# Altium PCB STM32F407VET6_4Layer_PCB.PcbDoc (part 2 of 3)
Units mm, origin at the board's own origin, x right, y up, seen from the top; angles counter-clockwise.
Board outline 86 x 80 mm, 4 copper layers (L1, L2, L3, L4), stack 0.999 mm thick; 172 components, 128 nets, 654 pads, 524 vias.
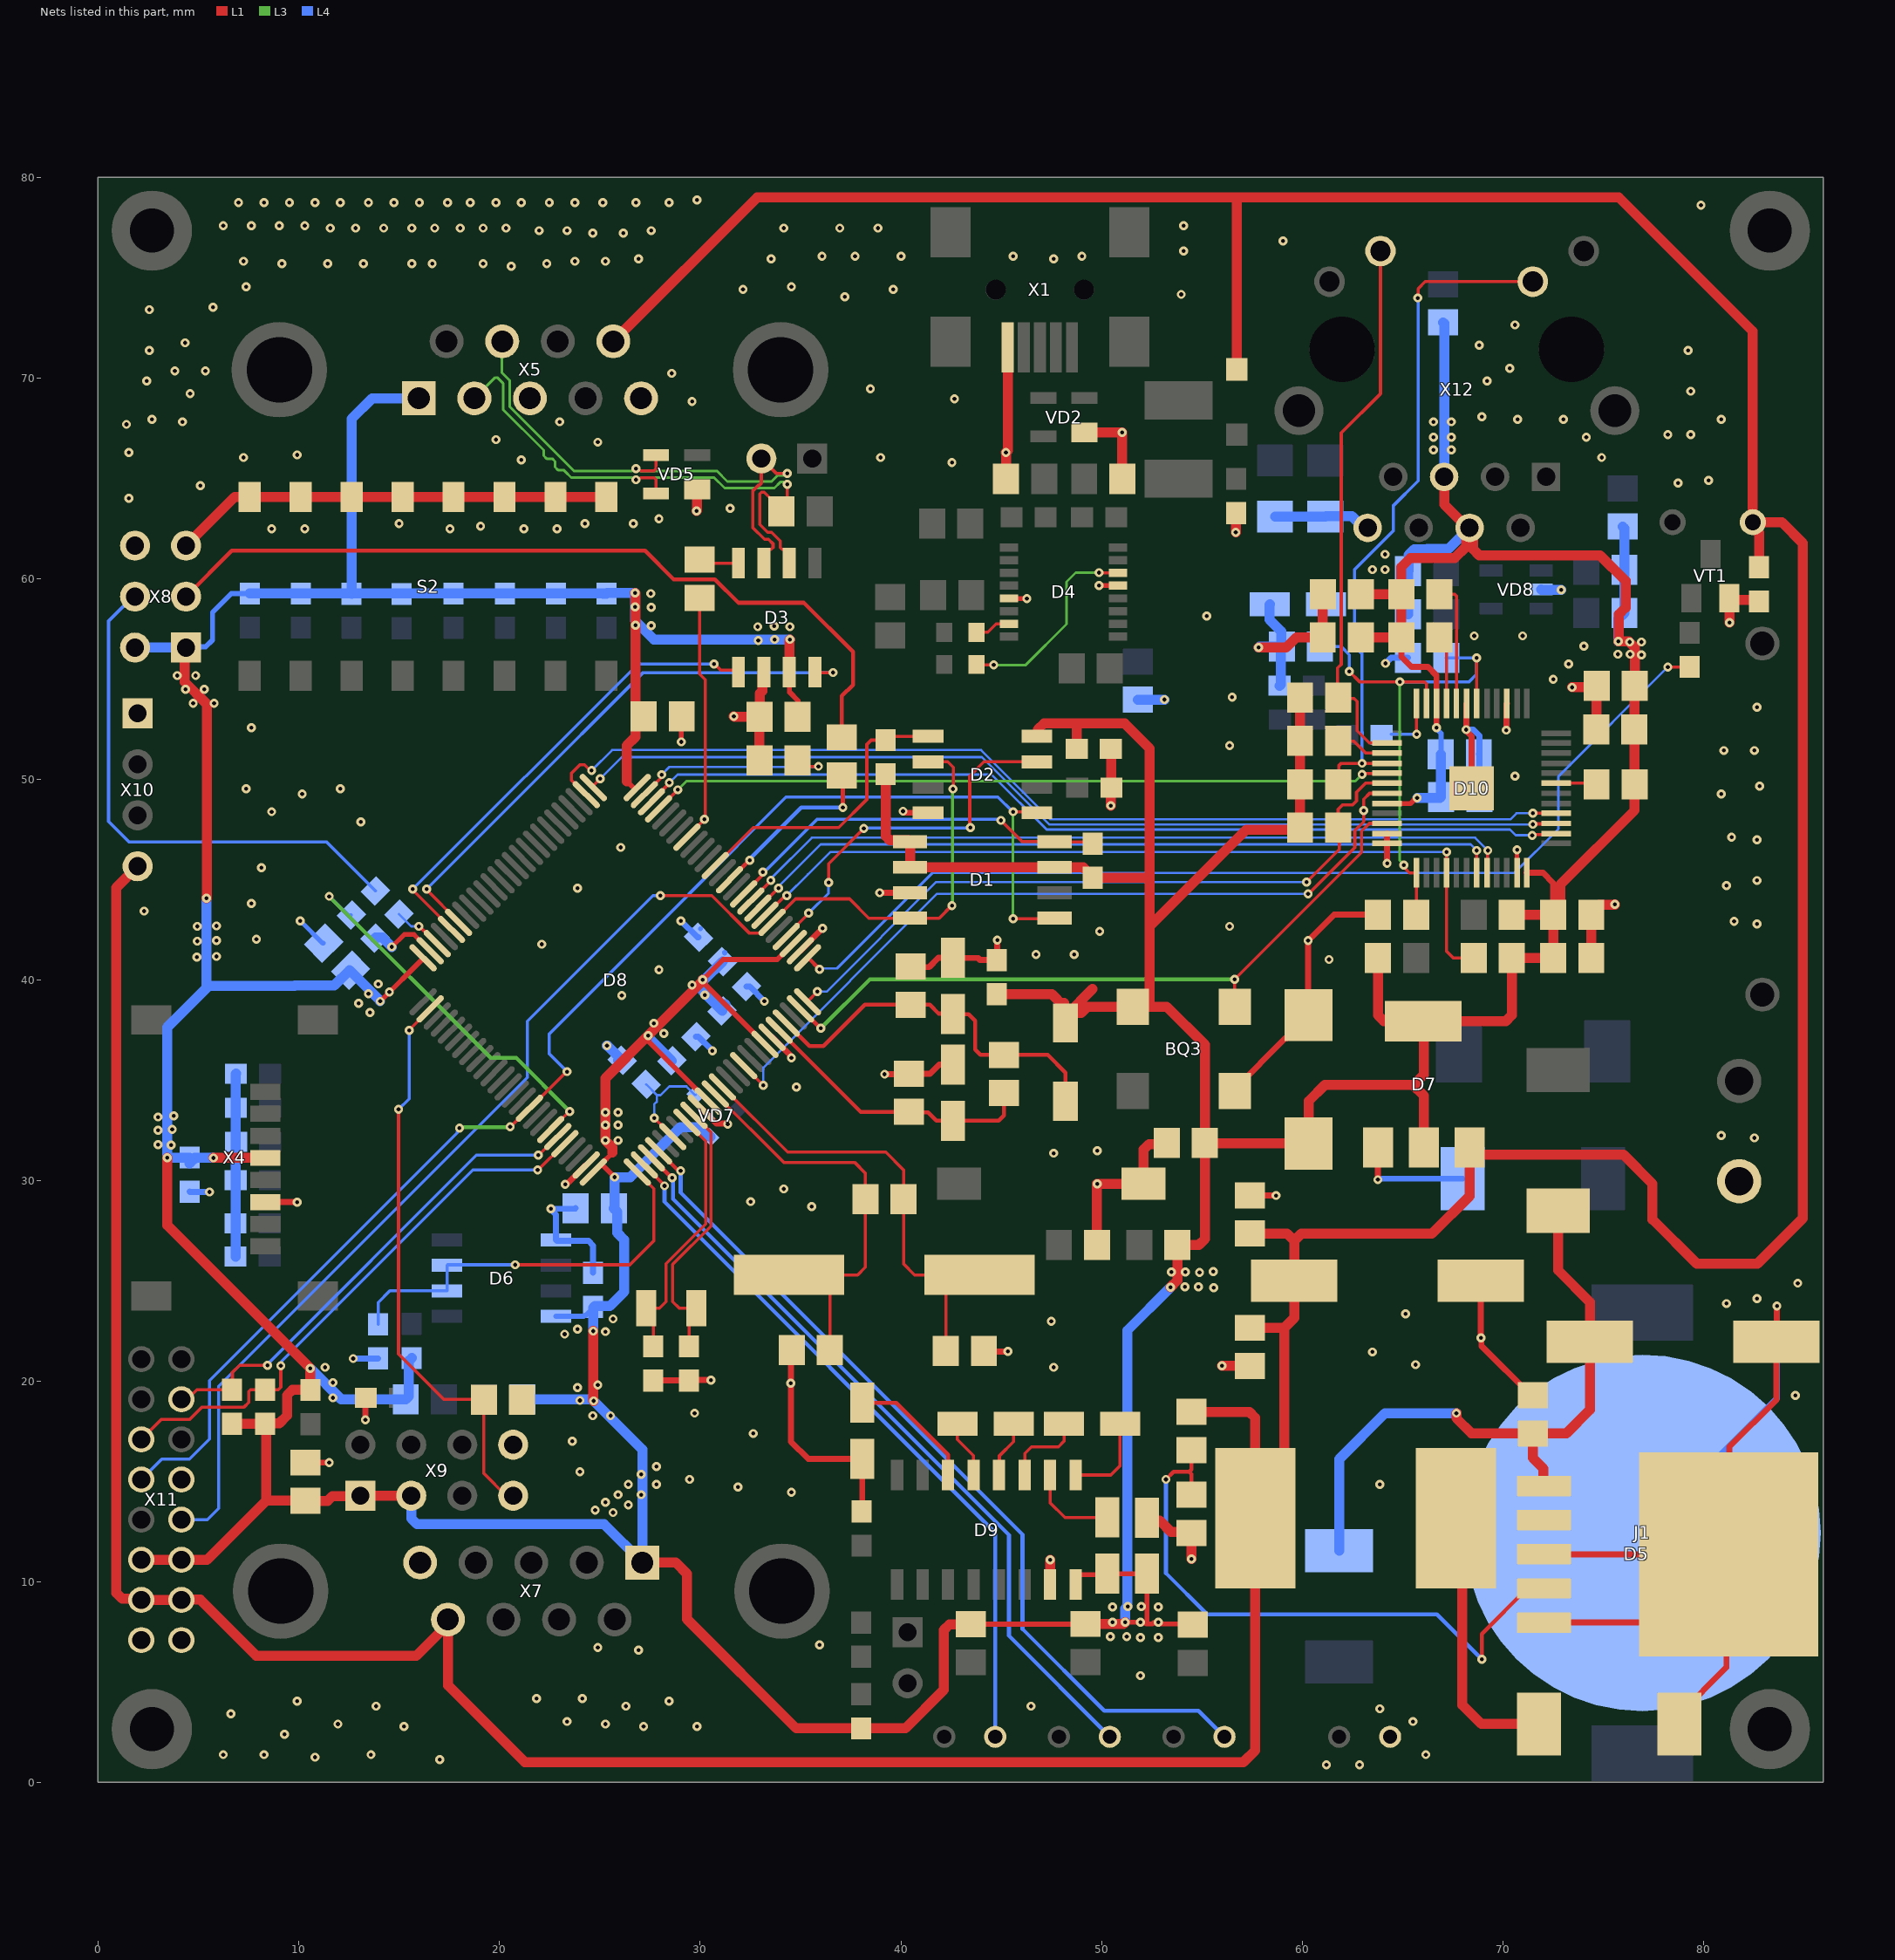
[diagram p4: the nets of this part, all layers, seen from the top]

## Via types
v1: diameter 0.45, hole 0.2, L1 to L4, 524 vias

## Nets (pads, with @x,y where several pads share a name; then routed paths per layer and width w, separated by ;. In a path a pad name is that pad's centre, name@x,y a point inside that pad or via, vN(x,y) a via of type N, cw(c..) or ccw(c..) an arc to the next point about the centre after c; other vN are vias at no path point)
3V3: BQ3.4 C2.2 C3.1 C8.2 C10.1 C11.1 C19.1 C20.2 C21.2 C22.2 C23.1 C24.2 C27.2 C28.2 C33.2 C39.1 C40.1 C41.1 C42.1 C43.2 C45.2 C48.2 C49.2 C50.1 C51.1 D1.3 D1.5 D1.6 D2.8 D3.3 D6.8 D7.2 D7.4 D8.11 D8.19 D8.28 D8.50 D8.75 D8.100 D9.16 D10.22 D10.32 D10.48 L2.1 R1.2 R2.2 R10.2 R12.2 R13.2 R14.2 R15.2 R17.2 R18.2 R22.1 R31.2 R32.1 R33.1 R34.1 R35.2 R36.2 R37.2 R38.2 R40.2 R42.2 R43.2 R45.2 R46.2 R47.2 R48.2 R49.2 R50.2 R52.2 R54.2 R55.2 R56.2 R57.2 R58.2 R59.2 R60.2 R61.2 R62.2 R63.2 R64.2 R65.2 R66.2 R67.2 R69.2 R70.2 VD7.2 X4.4 X5.1 X7.1 X8.1 X8.2 X9.1 X9.3 X11.11 X11.12 X12.4 X12.5 | length 502.8
  L1 w0.25: v1(14.046,38.938) 16.185,41.077 D8.75@16.185,41.107 ; D8.100@24.67,30.429 D8.100@25.057,30.816 ; 25.629,31.394 25.629,31.388 D8.100@25.057,30.816 ; v1(25.73,30.175) 25.089,30.816 D8.100@25.057,30.816 ; 26.34,49.911 26.744,49.507 26.777,49.507 D8.50@26.862,49.592 ; v1(27.407,37.236) 27.445,37.198 27.445,36.918 D8.11@30.398,33.965 ; D8.19@33.226,36.793 30.163,39.857 30.163,39.967 v1(30.124,40.005) 31.14,41.021 33.834,41.021 34.627,41.814 D8.28@34.64,41.814 ; D3.3@34.442,55.352 34.442,54.331 34.468,54.331 34.874,53.924 34.874,53.137 C8.2@34.849,53.111 ; R33.1@43.485,7.894 49.185,7.894 R34.1@49.2,7.91 ; D9.16@48.705,9.871 48.705,10.183 48.885,10.363 50.241,10.363 C20.2@50.292,10.414 50.295,10.411 C23.1@52.273,10.411 52.273,7.935 52.299,7.91 ; v1(51.181,8.001) v1(51.943,8.001) 51.981,7.963 52.179,7.963 52.232,7.91 52.299,7.91 ; R32.1@54.559,7.869 54.519,7.91 52.978,7.91 52.886,8.001 v1(52.832,8.001) 52.794,7.963 52.596,7.963 52.543,7.91 52.299,7.91 ; D10.32@64.237,48.793 65.402,48.793 65.681,49.073 v1(65.735,49.073)
  L1 w0.3: R42.2@64.948,57.074 64.948,56.109 65.456,55.601 66.269,55.601 66.7,55.169 D10.22@66.7,53.772 v1(66.7,52.578) ; D10.48@71.196,45.339 72.009,45.339 72.517,44.831 C39.1@72.517,43.256
  L1 w0.5: X11.11@2.14,11.106 X11.12@4.14,11.106 5.417,11.106 8.362,14.051 ; v1(3.429,31.14) 3.429,27.781 v1(10.566,20.643) R38.2@10.566,19.57 10.553,19.583 9.677,19.583 9.398,19.304 9.398,18.288 9.017,17.907 8.329,17.907 R60.2@8.306,17.883 ; X8.1@4.369,56.566 4.293,56.49 4.293,54.864 5.41,53.746 5.41,44.094 v1(5.385,44.069) ; v1(5.733,31.133) X4.4@8.331,31.133 ; R67.2@6.655,17.883 R60.2@8.306,17.883 ; X9.3@15.596,14.3 X9.1@13.056,14.3 13.03,14.275 11.659,14.275 11.43,14.046 10.317,14.046 C43.2@10.312,14.051 8.362,14.051 ; v1(24.663,22.504) 24.663,19.05 v1(24.689,19.025) ; 25.629,31.394 25.629,31.648 v1(25.273,32.004) 25.273,35.103 v1(27.407,37.236) 30.124,39.954 v1(30.124,40.005) ; 26.34,49.911 26.34,51.689 26.772,52.121 26.772,59.258 v1(26.746,59.284) ; X7.1@27.118,10.968 28.783,10.968 29.337,10.414 29.337,8.153 34.784,2.706 R22.1@38.024,2.706 40.222,2.706 42.139,4.623 42.139,7.602 42.431,7.894 R33.1@43.485,7.894 ; D3.3@34.442,55.352 34.442,56.947 v1(34.468,56.972) ; R1.2@39.243,50.255 39.243,47.168 39.447,46.963 40.387,46.963 D1.5@40.462,46.888 D1.6@40.462,45.618 D1.3@47.662,45.618 49.086,45.618 49.555,45.149 R2.2@49.555,45.099 52.371,45.099 52.408,45.136 ; C2.2@44.78,39.296 47.534,39.296 L2.1@48.133,38.696 ; D2.8@46.781,52.146 46.838,52.203 46.838,52.488 47.13,52.781 48.793,52.781 ; L2.1@48.133,37.936 L2.1@48.133,38.696 ; 48.133,38.868 L2.1@48.133,38.696 ; L2.1@48.184,38.645 L2.1@48.133,38.696 ; C3.1@48.77,51.511 48.77,52.758 48.793,52.781 ; R34.1@49.2,7.91 51.09,7.91 v1(51.181,8.001) ; 49.555,39.556 48.26,38.261 48.26,37.987 48.635,38.362 48.985,38.362 49.291,38.668 BQ3.4@51.562,38.668 52.408,38.668 ; v1(53.442,24.689) 53.782,25.029 R31.2@53.782,26.797 54.861,26.797 55.154,27.09 C45.2@55.154,31.877 ; R48.2@59.898,54.077 R52.2@59.898,51.918 R50.2@59.898,49.759 R45.2@59.898,47.6 59.797,47.498 57.226,47.498 52.408,42.68 ; C49.2@62.931,57.079 C49.2@62.926,57.074 R42.2@64.948,57.074 R43.2@64.948,59.233 ; C48.2@62.936,59.233 R43.2@64.948,59.233 ; R46.2@63.784,41.097 63.784,38.24 64.077,37.948 D7.4@66.04,37.948 ; D7.2@66.065,31.648 66.065,34.239 65.532,34.773 ; X12.5@67.081,65.075 67.081,63.703 68.25,62.535 X12.4@68.351,62.535 ; R47.2@70.455,43.256 C39.1@72.517,43.256 ; R60.2@8.306,17.883 8.362,17.828 8.362,14.051 ; 48.793,52.781 51.156,52.781 52.408,51.528 52.408,45.136 ; 52.408,38.668 52.408,42.68 ; 52.408,38.668 53.255,38.668 55.154,36.769 C45.2@55.154,31.877 ; 52.408,42.68 52.408,45.136 ; C45.2@55.154,31.877 55.179,31.852 C19.1@60.325,31.852 60.325,33.96 61.138,34.773 65.532,34.773 ; R43.2@64.948,59.233 64.948,60.579 65.405,61.036 67.615,61.036 68.175,61.596 68.175,62.358 X12.4@68.351,62.535 ; 65.532,34.773 65.557,34.773 66.065,35.281 66.065,37.922 D7.4@66.04,37.948 ; D7.4@66.04,37.948 70.155,37.948 70.455,38.247 R49.2@70.455,41.097 C40.1@72.517,41.097 C39.1@72.517,43.256 ; X12.4@68.351,62.535 68.528,62.358 68.528,61.469 68.834,61.163 74.854,61.163 76.124,59.893 76.124,58.56 75.781,58.217 75.781,56.883 v1(75.768,56.871) 76.288,56.871 76.581,56.578 C50.1@76.581,54.661 76.573,54.653 76.573,52.484 C51.1@76.566,52.476 76.571,52.471 76.571,49.764 R35.2@76.576,49.759 76.576,48.458 72.874,44.756 72.874,43.613 C39.1@72.517,43.256
  L4 w0.25: X8.1@4.369,56.566 4.408,56.605 5.347,56.605 5.69,56.947 5.69,58.318 6.629,59.258 R54.2@7.544,59.258 ; D6.8@22.803,23.241 24.193,23.241 24.238,23.287 24.288,23.287 C10.1@24.663,23.662 ; R66.2@25.171,59.256 R66.2@25.173,59.256 ; C27.2@31.217,41.351 C27.2@31.217,41.377 ; v1(66.7,52.578) 66.7,52.524 66.929,52.295 66.929,51.278 C41.1@66.909,51.257
  L4 w0.5: X8.2@1.829,56.566 X8.1@4.369,56.566 ; C11.1@4.547,30.861 4.75,31.064 4.75,31.086 4.797,31.133 v1(5.733,31.133) ; C11.1@4.547,31.152 4.535,31.14 v1(3.429,31.14) 3.429,37.643 5.385,39.599 ; v1(5.385,44.069) 5.385,39.599 ; 6.821,30.937 6.846,30.963 ; R13.2@6.834,26.213 6.846,26.225 6.846,30.963 ; R14.2@6.858,35.331 6.846,35.32 6.846,30.963 ; R54.2@7.544,59.258 R54.2@7.544,59.258 R56.2@12.624,59.257 ; v1(10.566,20.643) 12.109,19.101 R40.2@15.321,19.101 15.471,19.251 15.471,21.01 R10.2@15.621,21.16 ; R56.2@12.624,59.245 R56.2@12.624,59.257 ; v1(14.046,38.938) 14.046,38.969 12.525,40.49 11.76,39.726 9.804,39.726 9.779,39.7 5.486,39.7 5.385,39.599 ; X9.3@15.596,14.3 15.596,13.171 15.888,12.878 25.208,12.878 X7.1@27.118,10.968 27.118,16.595 v1(24.689,19.025) 24.613,19.101 R36.2@21.133,19.101 ; X5.1@15.972,68.989 13.642,68.989 12.624,67.97 R56.2@12.624,59.257 ; v1(24.663,22.504) 24.663,23.662 24.751,23.749 25.502,23.749 26.213,24.46 26.213,27.051 25.857,27.407 25.857,28.458 C28.2@25.69,28.626 25.73,28.666 v1(25.73,30.175) 26.518,30.175 29.007,32.664 30.006,32.664 30.485,32.184 VD7.2@30.508,32.184 ; v1(27.407,37.236) 27.407,37.152 C24.2@28.584,35.975 ; C22.2@31.098,38.464 30.116,39.446 30.116,39.997 v1(30.124,40.005) 30.201,40.005 C27.2@31.115,40.919 ; C22.2@31.242,38.777 C22.2@31.242,38.786 ; v1(34.468,56.972) 27.686,56.972 26.746,57.912 v1(26.746,59.284) 25.351,59.284 R66.2@25.324,59.256 R66.2@25.173,59.256 ; v1(51.181,8.001) 51.181,8.672 51.283,8.773 51.283,22.53 v1(53.442,24.689) ; R63.2@65.283,58.217 65.28,58.219 65.28,60.373 R65.2@65.278,60.376 65.303,60.401 65.303,61.181 65.596,61.474 66.251,61.474 66.253,61.476 67.292,61.476 X12.4@68.351,62.535 ; v1(65.735,49.073) 66.883,49.073 66.921,49.111 66.921,51.244 C41.1@66.909,51.257 ; R70.2@67.031,72.771 67.081,72.72 X12.5@67.081,65.075 ; v1(75.768,56.871) 75.768,57.993 R61.2@76.068,58.293 R58.2@76.068,60.452 76.068,62.504 R69.2@75.971,62.601 ; R56.2@12.624,59.257 R66.2@25.172,59.257 ; R66.2@25.172,59.257 R66.2@25.173,59.256
  other v1: 51.943,7.239 52.832,7.239 50.446,7.275 51.257,7.275 50.546,8.001 50.546,8.763 51.308,8.773 51.994,8.773 52.832,8.763 25.654,13.462 24.765,13.589 26.416,13.843 25.273,13.97 25.908,14.351 27.051,14.351 26.416,14.859 27.813,14.859 27.051,15.367 27.813,15.748 24.638,18.288 25.527,18.288 24.003,19.05 11.684,19.177 23.876,19.685 24.892,19.812 11.684,19.939 11.303,20.701 23.241,22.352 25.273,22.479 23.876,22.606 25.654,23.114 55.601,24.663 54.153,24.714 54.839,24.714 54.889,25.425 53.492,25.451 54.178,25.451 55.575,25.476 3.632,31.775 2.972,31.801 25.908,32.004 2.972,32.512 3.683,32.563 25.273,32.766 25.908,32.766 2.972,33.172 3.759,33.223 25.273,33.401 25.908,33.401 28.194,37.338 27.686,37.846 13.538,38.379 12.979,38.837 30.226,39.243 13.462,39.319 14.503,39.395 29.591,39.751 13.945,39.802 4.902,41.148 5.893,41.173 4.928,41.935 5.893,41.961 4.928,42.672 5.893,42.697 4.724,53.797 5.766,53.797 4.343,54.483 5.283,54.483 3.937,55.169 4.851,55.169 76.911,56.21 75.743,56.236 76.352,56.236 76.327,56.845 76.911,56.845 32.893,56.921 33.706,56.972 32.868,57.607 34.468,57.607 33.68,57.633 27.559,57.658 26.772,57.683 27.559,58.572 26.746,58.598 27.534,59.258 63.5,60.452 64.135,60.452 64.135,61.214 66.548,66.421 67.437,66.421 66.548,67.056 67.437,67.056 66.548,67.818 67.437,67.818
5V: C12.2 C13.1 C14.2 C44.2 D7.3 G1.+ L1.2 R26.2 VD4.C X5.9 X7.9 X10.4 X11.13 X11.14 | length 292.6
  L1 w0.5: X10.4@1.956,45.669 0.889,44.602 0.889,9.462 1.182,9.169 2.077,9.169 X11.13@2.14,9.106 X11.14@4.14,9.106 4.152,9.119 5.08,9.119 7.874,6.325 15.85,6.325 17.423,7.898 X7.9@17.423,8.128 17.423,4.853 21.26,1.016 57.074,1.016 57.666,1.608 L1.2@57.666,13.183 ; X5.9@25.667,71.829 32.832,78.994 56.744,78.994 ; R26.2@54.483,18.476 57.373,18.476 57.666,18.183 L1.2@57.666,13.183 ; VD4.C@56.744,70.428 56.744,78.994 ; C12.2@57.404,22.667 59.116,22.667 ; C14.2@57.404,27.371 59.243,27.371 59.612,27.002 ; C44.2@82.779,60.565 82.779,62.286 82.467,62.598 G1.+@82.467,62.814 ; 56.744,78.994 75.794,78.994 82.467,72.32 G1.+@82.467,62.814 ; L1.2@57.666,13.183 59.116,14.633 59.116,22.667 ; 59.116,22.667 59.612,23.163 C13.1@59.612,25.019 59.612,27.002 ; 59.612,27.002 59.966,27.356 66.472,27.356 68.351,29.235 D7.3@68.351,31.648 68.707,32.004 68.707,31.437 68.851,31.293 76.022,31.293 77.47,29.845 77.47,28.067 79.68,25.857 82.702,25.857 84.963,28.118 84.963,61.773 83.922,62.814 G1.+@82.467,62.814
50MHz: BQ3.3 D8.24 D10.34 | length 35.9
  L1 w0.155: BQ3.3@56.642,38.668 v1(56.642,40.03) 62.967,46.355 62.967,47.422 63.348,47.803 D10.34@64.237,47.803
  L1 w0.2: D8.24@34.994,38.561 35.021,38.561 35.99,37.592 v1(36.017,37.592)
  L3 w0.2: v1(36.017,37.592) 38.456,40.03 v1(56.642,40.03)
BOOT0: R29.2 X8.4 | length 26.5
  L4 w0.155: X8.4@1.829,59.106 1.727,59.106 0.508,57.887 0.508,47.904 1.524,46.888 11.362,46.888 R29.2@13.809,44.441
BOOT1: R28.2 X8.3 | length 40.8
  L1 w0.2: X8.3@4.369,59.106 6.655,61.392 27.254,61.392 28.677,59.969 30.73,59.969 31.899,58.801 35.167,58.801 37.617,56.35 37.617,54.712 37.059,54.153 R28.2@37.059,52.095
CAN1_Rx: D3.4 D8.70 | length 28
  L1 w0.155: v1(16.358,44.526) 16.358,44.498 17.953,42.903 D8.70@17.953,42.874 ; D3.4@35.712,55.352 35.744,55.321 v1(36.627,55.321)
  L4 w0.155: v1(16.358,44.526) 20.975,49.144 27.153,55.321 v1(36.627,55.321)
CAN1_Tx: D3.1 D8.71 | length 23.9
  L1 w0.155: v1(15.672,44.526) 15.672,44.487 17.599,42.56 D8.71@17.599,42.521 ; v1(30.683,55.753) 30.721,55.753 31.025,55.448 31.807,55.448 D3.1@31.902,55.352
  L4 w0.155: v1(15.672,44.526) 26.899,55.753 v1(30.683,55.753)
CAN_N: D3.6 R9.1 VD5.4 X5.2 | length 28.2
  L1 w0.155: 27.035,65.029 27.704,65.029 27.795,64.939 VD5.4@27.795,64.247 ; v1(34.341,64.703) 34.341,63.637 R9.1@34.051,63.348 34.051,63.448 33.187,64.312 33.059,64.312 32.968,64.221 32.968,62.702 33.353,62.317 33.55,62.317 33.985,61.882 33.985,61.552 34.076,61.461 34.195,61.461 34.442,61.214 D3.6@34.442,60.776
  L3 w0.13: X5.2@18.742,68.989 19.778,70.025 19.886,70.025 20.172,69.739 20.172,68.434 22.154,66.452 22.2,66.406 22.2,66.123 22.341,65.981 22.624,65.981 22.766,65.84 22.766,65.557 22.907,65.416 23.19,65.416 23.272,65.334 23.564,65.042 26.6,65.042 ; v1(26.797,64.932) 26.884,64.932 26.994,65.042 30.691,65.042 31.217,64.516 33.696,64.516 33.993,64.813 34.144,64.813 34.254,64.703 v1(34.341,64.703)
CAN_P: D3.7 VD5.3 X3.2 X5.7 | length 28.1
  L1 w0.155: 27.035,65.384 27.704,65.384 27.795,65.475 VD5.3@27.795,66.167 ; D3.7@33.172,60.776 33.172,61.214 33.42,61.461 33.539,61.461 33.63,61.552 33.63,61.735 33.403,61.962 33.206,61.962 32.613,62.555 32.613,64.368 32.911,64.667 32.955,64.667 33.045,64.758 X3.2@33.045,65.989 33.782,65.253 v1(34.341,65.253)
  L3 w0.13: X5.7@20.127,71.829 20.119,71.821 20.119,70.259 20.502,69.876 20.502,68.57 23.7,65.372 26.6,65.372 ; v1(26.797,65.482) 26.884,65.482 26.994,65.372 30.827,65.372 31.353,64.846 33.56,64.846 33.856,65.143 34.144,65.143 34.254,65.253 v1(34.341,65.253)
CAN_Rs: D8.43 R3.2 | length 12.4
  L1 w0.155: D8.43@29.337,47.117 29.337,47.13 30.201,47.993 v1(30.201,48.006) 30.251,48.057 30.251,54.966 29.972,55.245 R3.2@29.972,59.045
  L4 w0.119: v1(30.201,48.006) v1@30.213,48.019
EEP_CS: D2.1 D8.39 R1.1 | length 14.9
  L1 w0.155: D8.39@30.751,45.703 32.648,47.6 36.906,47.6 38.303,48.997 38.303,51.74 38.518,51.955 R1.1@39.243,51.955 39.434,52.146 D2.1@41.357,52.146
GND: BQ3.2 C1.1 C2.1 C3.2 C4.1 C5.1 C6.1 C7.2 C8.1 C9.1 C10.2 C11.2 C12.1 C13.2 C14.1 C15.2 C16.2 C19.2 C21.1 C22.1 C23.2 C24.1 C25.2 C26.2 C27.1 C28.1 C29.1 C30.2 C31.1 C32.1 C33.1 C34.1 C35.1 C36.2 C37.1 C38.2 C39.2 C40.2 C41.2 C42.2 C43.1 C44.1 C45.1 C46.2 C47.2 C48.1 C49.1 C50.2 C51.2 C52.2 C53.1 C54.2 D1.7 D2.4 D3.2 D4.5 D4.13 D5.3 D5.5 D5.6 D6.5 D7.1 D8.10 D8.20 D8.27 D8.74 D8.99 D9.15 D10.15 D10.19 D10.35 D10.36 D10.47 D10.49 HL1.2 J1.3 R5.1 R11.1 R20.2 R25.1 R41.1 R53.2 R68.1 S1.2 S2.9 S2.10 S2.11 S2.12 S2.13 S2.14 S2.15 S2.16 VD1.2 VD2.1 VD5.1 VD6.1 VD8.2 VT1.E X1.5 X2.2 X4.6 X5.3 X5.5 X7.5 X8.5 X8.6 X9.8 X10.1 X11.8 X11.15 X11.16 X12.8 | length 242.1
  L1 w0.23: v1(14.626,41.652) 15.24,42.266 15.733,42.266 D8.74@16.538,41.46 ; v1(29.058,51.867) 29.058,53.116 C21.1@29.078,53.137 ; D4.5@45.39,59.017 45.396,59.011 46.272,59.011 v1(46.279,59.004) ; v1(49.886,59.665) 49.892,59.658 50.819,59.658 D4.13@50.825,59.652 ; D10.47@70.714,45.339 v1(70.714,46.482)
  L1 w0.3: X4.6@8.331,28.933 8.332,28.932 v1(9.906,28.931) v1(9.906,28.931) ; C43.1@10.312,15.951 v1(11.506,15.951) ; v1(13.31,18.085) 13.31,19.152 R41.1@13.335,19.177 ; v1(23.266,29.82) 23.295,29.848 23.382,29.848 D8.99@24.317,30.783 ; C15.2@27.661,20.042 C16.2@29.439,20.042 29.462,20.066 v1(30.531,20.066) ; D8.10@30.044,33.611 30.81,32.845 31.34,32.845 v1(31.369,32.817) ; D8.20@33.58,37.147 34.515,36.211 34.515,36.147 v1(34.544,36.119) ; C37.1@34.559,21.565 34.519,21.524 v1(34.519,19.914) 34.519,16.993 35.382,16.129 C31.1@38.075,16.129 38.075,13.538 R20.2@38.049,13.513 ; D8.27@34.994,41.46 36.093,42.56 v1(36.093,42.57) ; v1(38.938,44.348) D1.7@40.462,44.348 ; v1(39.192,35.306) 40.386,35.306 C29.1@40.411,35.331 41.453,35.331 41.91,35.789 C25.2@42.596,35.789 ; v1(40.107,48.412) 40.147,48.412 40.223,48.336 D2.4@41.357,48.336 ; C30.2@40.488,40.665 40.513,40.64 41.402,40.64 41.862,41.1 C26.2@42.596,41.1 42.599,41.097 43.84,41.097 43.942,40.996 C2.1@44.78,40.996 44.806,41.021 v1(44.806,41.986) ; C38.2@44.14,21.514 44.166,21.488 v1(45.339,21.488) ; BQ3.2@56.642,34.468 56.642,34.568 59.176,37.102 59.275,37.102 60.3,38.127 v1(60.3,41.961) 61.595,43.256 C47.2@63.784,43.256 ; C14.1@57.404,29.271 57.414,29.261 v1(58.699,29.261) ; v1(63.779,30.048) D7.1@63.779,31.648 ; v1(64.237,45.822) D10.36@64.237,46.812 D10.35@64.237,47.295 ; D10.19@68.199,53.772 68.189,53.762 68.189,52.492 v1(68.174,52.476) 68.174,52.436 68.453,52.156 D10.49@68.453,49.555 ; C13.2@68.912,25.019 68.91,25.017 v1(68.91,22.174) 68.939,22.146 68.939,21.766 71.401,19.304 C6.1@71.501,19.304 ; v1(70.18,52.451) 70.195,52.466 70.195,53.762 D10.15@70.206,53.772 ; D5.5@72.065,7.976 77.856,7.976 D5.6@81.153,11.274 ; D5.3@72.065,11.38 D5.6@81.259,11.38 ; VD6.1@78.811,2.921 78.811,3.396 81.153,5.738 D5.6@81.153,11.274 ; v1(83.668,23.749) 83.668,21.995 C7.2@83.644,21.971 83.644,19.077 81.301,16.734 81.301,11.422 D5.6@81.259,11.38 ; D5.6@81.153,11.274 D5.6@81.259,11.38
  L1 w0.5: X8.5@4.369,61.646 6.792,64.069 S2.9@7.544,64.069 S2.10@10.084,64.069 S2.11@12.624,64.069 S2.12@15.164,64.069 S2.13@17.704,64.069 S2.14@20.244,64.069 S2.15@22.784,64.069 S2.16@25.324,64.069 ; v1(29.82,63.373) 29.845,63.398 VD5.1@29.845,64.447 ; v1(31.674,53.137) 31.699,53.111 C8.1@32.949,53.111 ; C34.1@32.949,50.952 C8.1@32.949,53.111 ; D3.2@33.172,55.352 33.097,55.277 33.097,54.408 32.969,54.28 32.969,53.132 C8.1@32.949,53.111 ; C4.1@45.242,64.973 45.242,66.289 v1(45.237,66.294) 45.329,66.386 X1.5@45.329,71.517 ; D9.15@47.435,9.871 47.435,10.371 47.447,10.383 v1(47.447,11.1) ; VD2.1@49.158,67.287 51.027,67.287 v1(51.029,67.285) 51.039,67.274 C5.1@51.039,64.973 ; C36.2@49.779,26.797 49.779,29.84 v1(49.784,29.845) S1.2@52.098,29.845 52.098,31.549 52.375,31.826 53.203,31.826 C45.1@53.254,31.877 ; v1(50.47,48.692) 50.47,49.557 R5.1@50.493,49.581 50.482,49.593 50.482,51.499 C3.2@50.47,51.511 ; C23.2@52.273,13.211 52.429,13.056 52.908,13.056 53.467,12.497 54.432,12.497 R25.1@54.483,12.446 v1(54.483,11.151) ; v1(56.007,20.777) 56.017,20.767 C12.1@57.404,20.767 ; v1(56.693,62.306) 56.693,63.248 C1.1@56.718,63.273 ; v1(57.836,56.566) 59.207,56.566 59.715,57.074 C49.1@61.026,57.074 61.031,57.079 61.031,59.228 C48.1@61.036,59.233 ; v1(73.457,54.585) 74.605,54.585 C50.2@74.673,54.653 ; C40.2@74.417,41.097 C39.2@74.417,43.256 74.417,43.356 74.817,43.756 75.582,43.756 v1(75.59,43.764) ; C51.2@74.666,52.476 74.673,52.484 C50.2@74.673,54.653 ; C50.2@74.681,54.661 C50.2@74.673,54.653 ; v1(81.305,57.81) 81.3,57.815 VT1.E@81.3,59.03 81.383,58.947 82.697,58.947 C44.1@82.779,58.865
  L4 w0.23: v1(10.058,42.951) 11.176,41.834 C33.1@11.227,41.834 ; C27.1@30.006,42.553 C27.1@30.015,42.553
  L4 w0.3: C11.2@4.547,29.452 4.56,29.439 v1(5.537,29.439) ; v1(12.7,21.133) 13.931,21.133 R11.1@13.945,21.146 ; C28.1@23.79,28.626 23.764,28.6 v1(22.555,28.6) 22.555,28.56 22.803,28.312 D6.5@22.803,27.051 22.854,27 24.435,27 24.663,26.772 C10.2@24.663,25.412 ; v1(29.032,42.951) 29.862,42.121 C27.1@29.913,42.121 ; C24.1@29.786,37.177 29.904,37.177 v1(30.607,36.474) ; C22.1@32.3,39.666 32.47,39.666 v1(33.198,38.938) ; v1(63.779,30.048) 63.82,30.048 63.871,30.099 VD1.2@68.001,30.099 ; v1(64.16,55.778) 64.44,56.058 C46.2@65.283,56.058 ; v1(68.174,52.476) 68.529,52.476 68.834,52.172 68.834,51.283 C41.2@68.809,51.257 68.834,51.232 C42.2@68.834,49.124 ; J1.3@76.962,12.446 83.668,19.152 v1(83.668,23.749)
  L4 w0.5: C32.1@13.784,42.08 13.814,42.11 14.168,42.11 v1(14.626,41.652) ; v1(25.349,36.728) 25.375,36.728 C35.1@26.103,36 C35.1@25.898,36 ; C9.1@51.816,53.975 v1(53.137,53.975) ; v1(57.836,56.566) 57.887,56.617 C52.2@58.994,56.617 ; C54.2@58.395,58.725 58.369,58.699 58.369,57.963 58.953,57.379 58.953,56.657 C52.2@58.994,56.617 ; C53.1@58.649,63.094 58.652,63.091 R68.1@61.163,63.091 61.192,63.119 62.484,63.119 63.068,62.535 X12.8@63.271,62.535 ; R53.2@58.879,54.661 58.936,54.718 58.936,56.559 C52.2@58.994,56.617 ; VD8.2@71.913,59.461 71.938,59.436 v1(72.923,59.436)
  other v1: 61.214,0.889 62.865,0.889 17.018,1.143 10.795,1.27 6.223,1.397 8.255,1.397 13.589,1.397 66.167,1.397 9.271,2.413 15.24,2.794 27.178,2.794 29.845,2.794 11.938,2.921 25.273,2.921 23.368,3.048 65.532,3.048 6.604,3.429 63.881,3.683 13.843,3.81 26.289,3.81 46.482,3.81 9.906,4.064 28.448,4.064 21.844,4.191 24.13,4.191 51.943,5.334 26.924,6.604 24.892,6.731 35.941,6.858 34.544,14.478 31.877,14.732 63.881,14.859 29.464,15.113 24.003,15.494 23.622,17.018 32.639,17.399 29.718,18.415 84.582,19.304 47.625,20.701 65.659,20.828 63.5,21.463 47.498,22.987 65.151,23.368 81.153,23.876 82.677,24.13 84.709,24.892 35.56,28.702 32.512,28.956 34.163,29.591 47.625,31.369 49.784,31.496 82.55,32.131 80.899,32.258 34.798,34.671 26.089,39.223 27.94,40.513 61.341,41.021 46.736,41.275 48.641,41.275 22.098,41.783 7.874,42.037 49.911,42.418 56.388,42.672 82.677,42.799 81.534,42.926 2.286,43.434 7.62,43.815 23.876,44.577 81.153,44.704 82.677,44.958 8.128,45.593 26.035,46.609 82.677,46.99 81.407,47.117 13.081,47.879 8.636,48.387 10.16,49.276 80.899,49.276 7.366,49.53 12.065,49.53 82.804,49.657 70.612,50.165 81.026,51.435 82.55,51.435 56.388,51.689 7.62,52.578 82.677,53.594 56.515,54.102 72.517,54.991 73.279,55.753 74.041,56.642 68.58,57.15 70.993,57.15 55.251,58.132 8.636,62.484 10.287,62.484 17.526,62.484 21.209,62.484 22.86,62.484 19.05,62.611 14.986,62.738 24.257,62.738 26.67,62.738 27.94,62.992 31.496,63.5 1.524,64.008 5.08,64.643 78.74,64.77 80.264,64.897 42.545,65.786 21.082,65.913 7.239,66.04 38.989,66.04 74.93,66.04 9.906,66.167 1.524,66.294 24.892,66.802 19.812,66.929 74.168,67.056 78.232,67.183 79.375,67.183 1.397,67.691 4.191,67.818 22.987,67.818 2.667,67.945 70.739,67.945 73.025,67.945 80.899,67.945 68.961,68.072 29.591,68.834 42.672,68.961 4.572,69.215 79.375,69.342 38.481,69.469 2.413,69.85 69.215,69.85 28.575,70.231 3.81,70.358 5.334,70.358 70.358,70.485 2.54,71.374 79.248,71.374 68.834,71.628 4.318,71.755 70.612,72.644 2.54,73.406 5.715,73.533 37.211,74.041 53.975,74.168 32.131,74.422 39.624,74.422 7.366,74.549 34.544,74.549 20.574,75.565 9.144,75.692 11.43,75.692 13.208,75.692 15.621,75.692 16.637,75.692 19.177,75.692 22.352,75.692 7.239,75.819 23.749,75.819 25.273,75.819 26.924,75.946 33.528,75.946 47.625,75.946 36.068,76.073 37.719,76.073 40.005,76.073 45.593,76.073 49.022,76.073 54.102,76.327 59.055,76.835 24.638,77.216 26.162,77.216 21.971,77.343 23.368,77.343 27.559,77.343 11.557,77.47 12.827,77.47 14.224,77.47 15.621,77.47 16.764,77.47 18.034,77.47 19.177,77.47 20.32,77.47 34.163,77.47 36.957,77.47 38.862,77.47 6.223,77.597 7.62,77.597 9.017,77.597 10.287,77.597 54.102,77.597 79.883,78.613 6.985,78.74 8.255,78.74 9.525,78.74 10.795,78.74 12.065,78.74 13.462,78.74 14.732,78.74 16.002,78.74 17.399,78.74 18.542,78.74 19.812,78.74 21.082,78.74 22.479,78.74 23.749,78.74 25.146,78.74 26.797,78.74 28.448,78.74 29.845,78.867
I2C1_SCL: D8.95 R67.1 X11.4 | length 24.7
  L1 w0.155: X11.4@4.14,19.106 4.434,19.106 4.911,19.583 R67.1@6.655,19.583 6.68,19.609 6.68,20.447 7.036,20.803 v1(8.433,20.803) ; v1(21.92,31.267) 21.946,31.267 22.876,32.197 D8.95@22.902,32.197
  L4 w0.155: v1(8.433,20.803) 8.433,20.853 18.847,31.267 v1(21.92,31.267)
I2C1_SDA: D8.96 R60.1 X11.5 | length 28.3
  L1 w0.155: X11.5@2.14,17.106 3.144,18.11 4.559,18.11 5.169,18.72 7.264,18.72 7.493,18.948 7.493,19.493 7.584,19.583 R60.1@8.306,19.583 8.966,19.583 9.093,19.71 v1(9.093,20.777) ; v1(21.895,30.531) 21.919,30.531 23.232,31.843 D8.96@23.256,31.843
  L4 w0.155: v1(9.093,20.777) 9.15,20.834 9.15,21.011 18.669,30.531 v1(21.895,30.531)
JDTI: D8.77 R37.1 X9.7 | length 28.6
  L1 w0.155: v1(14.961,33.553) 14.961,21.361 17.221,19.101 19.192,19.101 R37.1@19.218,19.075 19.218,15.403 20.32,14.3 X9.7@20.676,14.3 ; v1(15.491,37.497) 15.491,37.505 16.538,38.553 D8.77@16.538,38.561
  L4 w0.155: v1(14.961,33.553) 15.491,34.083 v1(15.491,37.497)
LED1: D8.3 HL6.2 | length 38.3
  L1 w0.2: D8.3@27.569,31.136 27.587,31.136 28.581,30.142 v1(28.599,30.142)
  L4 w0.2: v1(28.599,30.142) 28.644,30.096 28.644,29.09 45.39,12.344 45.39,7.315 HL6.2@50.419,2.286
LED2: D8.2 HL5.2 | length 35.7
  L1 w0.2: D8.2@27.216,30.783 27.216,30.765 28.219,29.761 v1(28.219,29.743)
  L4 w0.2: v1(28.219,29.743) 28.219,28.942 44.704,12.457 HL5.2@44.704,2.286
LED3: D8.4 HL4.2 | length 43.7
  L1 w0.2: D8.4@27.923,31.49 28.871,30.542 28.976,30.542 v1(29.024,30.494)
  L4 w0.2: v1(29.024,30.494) 29.024,29.396 46.063,12.357 46.063,7.658 50.14,3.581 54.839,3.581 HL4.2@56.134,2.286
MISO: D1.8 D2.2 D8.31 X11.10 | length 66.9
  L1 w0.155: v1(28.012,44.203) 30.575,44.203 32.434,42.344 33.049,42.344 34.749,44.044 37.44,44.044 38.405,43.078 D1.8@40.462,43.078 41.91,43.078 v1(42.545,43.713) ; D2.2@41.357,50.876 42.342,50.876 42.621,50.597 42.621,49.546 v1(42.596,49.521)
  L3 w0.155: v1(42.545,43.713) 42.57,43.739 42.57,49.496 v1(42.596,49.521)
  L4 w0.155: X11.10@4.14,13.106 5.436,13.106 5.994,13.665 5.994,19.751 21.387,35.143 21.387,37.948 27.642,44.202 v1(28.012,44.203)
MOSI: D1.1 D2.5 D8.91 X11.7 | length 70.9
  L1 w0.155: v1(20.523,32.69) 20.545,32.69 21.466,33.611 D8.91@21.488,33.611 21.517,33.611 23.339,35.433 v1(23.368,35.433) ; v1(45.593,43.053) D1.1@47.637,43.053 ; v1(45.593,48.387) 46.73,48.387 D2.5@46.781,48.336 ; D1.1@47.498,43.053 D1.1@47.637,43.053 ; D1.1@47.498,43.078 D1.1@47.662,43.078 D1.1@47.637,43.053
  L3 w0.13: v1(45.593,43.053) v1(45.593,48.387)
  L3 w0.2: v1(18.001,32.621) 18.044,32.664 20.498,32.664 v1(20.523,32.69)
  L4 w0.155: X11.7@2.14,15.106 3.163,16.129 4.547,16.129 5.537,17.12 5.537,20.041 17.878,32.382 17.878,32.454 18.001,32.577 v1(18.001,32.621) ; v1(23.368,35.433) 22.479,36.322 22.479,37.313 29.439,44.272 29.439,44.283 34.274,49.118 44.836,49.118 45.568,48.387 v1(45.593,48.387)
NetBQ1_1: BQ1.1 C16.1 D8.9 | length 13.8
  L1 w0.155: C16.1@29.439,21.742 29.439,23.286 BQ1.1@29.8,23.647 28.956,23.647 28.626,23.978 28.626,25.827 30.531,27.732 30.531,32.417 D8.9@29.691,33.258
NetBQ1_2: BQ1.2 C15.1 D8.8 | length 13.3
  L1 w0.155: C15.1@27.661,21.742 27.661,23.286 BQ1.2@27.3,23.647 27.965,23.647 28.296,23.978 28.296,25.857 30.276,27.837 30.276,31.965 D8.8@29.337,32.904
NetBQ2_1: BQ2.1 C38.1 D8.13 R30.1 | length 23.6
  L1 w0.155: D8.13@31.105,34.672 34.357,31.42 39.243,31.42 40.132,30.531 R30.1@40.132,29.083 40.132,25.857 40.691,25.299 BQ2.1@43.163,25.299 ; C38.1@42.24,21.514 42.24,24.376 BQ2.1@43.163,25.299 ; BQ2.1@43.917,25.299 BQ2.1@43.163,25.299
NetBQ2_2: BQ2.2 C37.2 D8.12 R30.2 | length 21.9
  L1 w0.155: D8.12@30.751,34.318 34.158,30.912 37.694,30.912 38.232,30.373 R30.2@38.232,29.083 38.232,25.684 37.846,25.299 BQ2.2@35.537,25.299 ; BQ2.2@34.417,25.299 BQ2.2@35.537,25.299 ; C37.2@36.459,21.565 36.459,24.376 BQ2.2@35.537,25.299
NetC6_2: C6.2 C7.1 D5.1 R8.1 VD3.2 | length 32.5
  L1 w0.5: v1(67.691,18.415) 67.691,18.161 68.448,17.404 C6.2@71.501,17.404 ; D5.1@72.065,14.784 72.034,14.814 72.034,15.646 71.501,16.18 C6.2@71.501,17.404 ; VD3.2@72.771,28.504 72.771,25.527 74.344,23.954 C7.1@74.344,21.971 74.344,18.576 73.172,17.404 C6.2@71.501,17.404
  L4 w0.5: R8.1@61.849,11.57 61.849,16.129 64.135,18.415 v1(67.691,18.415)
NetC17_1: C17.1 D9.1 | length 4.5
  L1 w0.155: D9.1@48.705,15.332 50.46,15.332 50.93,15.802 C17.1@50.93,17.882
NetC17_2: C17.2 D9.3 | length 4.2
  L1 w0.155: D9.3@46.165,15.332 46.177,15.344 46.177,16.408 46.507,16.739 47.854,16.739 48.13,17.015 C17.2@48.13,17.882
NetC18_1: C18.1 D9.4 | length 2.9
  L1 w0.155: D9.4@44.895,15.332 44.912,15.349 44.912,16.287 45.621,16.996 C18.1@45.621,17.882
NetC18_2: C18.2 D9.5 | length 2.9
  L1 w0.155: C18.2@42.821,17.882 42.821,17.109 43.625,16.306 D9.5@43.625,15.332
NetC20_1: C20.1 D9.2 | length 4.5
  L1 w0.155: D9.2@47.435,15.332 47.435,13.957 48.178,13.214 C20.1@50.292,13.214
NetC25_1: C25.1 C29.2 D8.21 R27.2 | length 14.3
  L1 w0.2: D8.21@33.933,37.5 38.002,33.431 C29.2@40.411,33.431 40.442,33.401 41.351,33.401 41.764,32.989 C25.1@42.596,32.989 44.469,32.989 44.475,32.995 44.882,32.995 45.136,33.249 R27.2@45.136,34.366
NetC26_1: C26.1 C30.1 D8.22 L2.2 R27.1 | length 18.9
  L1 w0.2: D8.22@34.287,37.854 35.438,36.703 36.144,36.703 38.207,38.765 C30.1@40.488,38.765 41.448,38.765 41.885,38.329 42.567,38.329 C26.1@42.596,38.3 43.386,38.3 43.713,37.973 43.713,36.525 43.972,36.266 R27.1@45.136,36.266 47.325,36.266 48.209,35.382 L2.2@48.209,33.96
NetC31_2: C31.2 D9.6 | length 6.4
  L1 w0.2: C31.2@38.075,18.929 39.77,18.929 42.355,16.344 D9.6@42.355,15.332
NetC32_2: C32.2 D8.73 | length 2.5
  L1 w0.155: v1(15.977,42.672) 16.005,42.672 16.863,41.814 D8.73@16.892,41.814
  L4 w0.119: C32.2@14.986,43.282 15.596,42.672 v1(15.977,42.672)
NetC34_2: C34.2 D8.49 | length 10.5
  L1 w0.155: D8.49@27.216,49.238 28.026,50.048 28.026,50.178 v1(28.082,50.234) ; C34.2@34.849,50.952 35.154,50.648 v1(35.89,50.648)
  L4 w0.119: v1(28.082,50.234) 28.47,50.622 35.865,50.622 v1(35.89,50.648)
NetC35_2: C35.2 D8.6 VD7.3 | length 5.5
  L1 w0.155: v1(27.705,33.122) D8.6@28.63,32.197
  L4 w0.119: C35.2@27.305,34.798 27.838,34.265 ; v1(27.705,33.122) 27.705,33.801 27.838,33.934 27.838,34.265 ; VD7.3@29.766,34.27 29.738,34.27 29.312,34.696 28.461,34.696 28.029,34.265 27.838,34.265
NetC46_1: C46.1 C47.1 C52.1 C54.1 D10.18 D10.23 D10.37 | length 30.6
  L1 w0.155: v1(62.357,55.372) 62.865,54.864 66.091,54.864 66.192,54.762 D10.23@66.192,53.772 ; v1(65.075,45.72) 65.131,45.664 65.131,45.562 65.354,45.339 D10.37@65.71,45.339 65.71,43.282 C47.1@65.684,43.256 ; D10.18@68.707,53.772 v1(68.707,56.058)
  L3 w0.13: v1(64.872,54.864) 64.872,45.956 65.075,45.753 v1(65.075,45.72)
  L4 w0.155: C54.1@61.195,58.725 60.894,58.424 C52.1@60.894,56.617 61.951,56.617 62.357,56.21 v1(62.357,55.372) ; v1(64.872,54.864) 68.326,54.864 68.707,55.245 v1(68.707,56.058) C46.1@67.183,56.058
NetD1_4: D1.4 D8.35 R2.1 | length 19.5
  L1 w0.155: D8.35@32.165,44.289 33.069,45.192 33.069,45.33 v1(33.126,45.386) ; v1(44.983,47.955) 46.047,46.892 47.659,46.892 D1.4@47.662,46.888 49.466,46.888 R2.1@49.555,46.799
  L4 w0.155: v1(33.126,45.386) 33.194,45.386 35.81,48.002 44.936,48.002 v1(44.983,47.955)
NetD2_7: D2.7 D8.29 | length 18.5
  L1 w0.155: D8.29@34.287,42.167 34.287,42.189 35.408,43.31 v1(35.408,43.332) ; v1(36.398,44.856) 36.398,45.796 v1(38.151,47.549) ; v1(43.459,47.6) 43.434,47.625 43.434,50.165 44.145,50.876 D2.7@46.781,50.876
  L4 w0.13: v1(35.408,43.332) 36.398,44.323 v1(36.398,44.856)
  L4 w0.155: v1(38.151,47.549) 38.176,47.574 43.434,47.574 v1(43.459,47.6)
NetD3_8: D3.8 R3.1 | length 2
  L1 w0.155: R3.1@29.972,60.945 30.14,60.776 D3.8@31.902,60.776
NetD4_7: D4.7 HL3.2 | length 1.8
  L1 w0.155: HL3.2@43.764,57.328 44.33,57.328 44.749,57.747 D4.7@45.39,57.747
NetD4_14: D4.14 HL2.2 | length 10.4
  L1 w0.155: HL2.2@43.764,55.347 44.12,55.702 v1(44.628,55.702) ; v1(49.886,60.3) 49.892,60.293 50.819,60.293 D4.14@50.825,60.287
  L3 w0.13: v1(44.628,55.702) 46.228,55.702 48.26,57.734 48.26,59.842 48.717,60.3 v1(49.886,60.3)
NetD5_2: D5.2 L1.1 VD6.2 | length 13.4
  L1 w0.5: L1.1@67.993,13.082 67.993,3.864 68.936,2.921 VD6.2@71.811,2.921
NetD5_4: D5.4 R25.2 R26.1 | length 31.1
  L1 w0.2: v1(53.213,15.113) 53.594,15.494 54.366,15.494 ; R25.2@54.483,14.346 54.483,15.377 54.366,15.494 ; R26.1@54.483,16.576 54.483,15.611 54.366,15.494 ; v1(68.961,6.147) 68.961,7.413 71.226,9.678 D5.4@72.065,9.678
  L4 w0.2: v1(53.213,15.113) 53.213,10.439 55.27,8.382 66.726,8.382 v1(68.961,6.147)
NetD6_2: D6.2 D6.3 D8.1 R11.2 | length 20.6
  L1 w0.155: v1(20.777,25.806) 26.492,25.806 27.686,27 27.686,29.605 D8.1@26.862,30.429
  L4 w0.155: R11.2@13.945,22.846 13.945,23.927 14.529,24.511 D6.2@17.379,24.511 D6.3@17.379,25.781 17.405,25.806 v1(20.777,25.806)
NetD8_16: D8.16 D10.31 | length 40.2
  L1 w0.155: D8.16@32.165,35.733 32.165,35.731 33.147,34.749 v1(33.147,34.747) ; v1(60.3,44.298) 60.325,44.298 62.626,46.598 62.626,47.442 63.068,47.884 v1(63.068,48.438) 63.068,49.007 63.362,49.301 D10.31@64.237,49.301
  L4 w0.119: v1(33.147,34.747) 33.147,35.636 41.808,44.298 v1(60.3,44.298)
NetD8_25: D8.25 D10.30 R45.1 | length 34.9
  L1 w0.155: D8.25@35.347,38.915 35.347,38.929 v1(35.839,39.421) ; v1(60.223,44.882) 61.849,46.507 61.849,47.549 R45.1@61.798,47.6 61.798,48.514 62.001,48.717 62.509,48.717 62.713,48.92 62.713,49.352 63.17,49.809 D10.30@64.237,49.809
  L4 w0.119: v1(35.839,39.421) 36.297,39.421 41.758,44.882 v1(60.223,44.882)
NetD8_26: D8.26 R39.1 | length 52
  L1 w0.155: v1(78.232,55.601) 79.322,55.601 R39.1@79.324,55.602
  L1 w0.2: D8.26@35.347,41.107 35.373,41.107 v1(35.941,40.538)
  L4 w0.119: v1(35.941,40.538) 35.977,40.575 36.816,40.575 41.576,45.335 70.583,45.335 72.771,47.523 72.771,50.14 v1(78.232,55.601)
NetD8_32: D8.32 D10.40 R49.1 | length 41.7
  L1 w0.155: D8.32@33.226,43.228 33.265,43.228 34.242,44.205 v1(34.314,44.205) ; v1(67.208,46.377) 67.208,41.427 67.539,41.097 R49.1@68.555,41.097
  L4 w0.119: v1(34.314,44.205) 35.375,45.266 36.486,46.377 v1(67.208,46.377)
NetD8_33: D8.33 D10.43 | length 38.4
  L1 w0.155: D8.33@32.873,43.581 32.893,43.581 33.889,44.577 v1(33.909,44.577) ; D10.43@68.707,45.339 v1(68.707,46.457)
  L4 w0.119: v1(33.909,44.577) 33.909,44.666 36.005,46.761 68.402,46.761 v1(68.707,46.457)
NetD8_34: D8.34 D10.44 | length 39.5
  L1 w0.155: D8.34@32.519,43.935 32.519,43.95 33.52,44.951 v1(33.52,44.966) ; D10.44@69.215,45.339 69.236,45.36 69.236,46.436 v1(69.257,46.457)
  L4 w0.119: v1(33.52,44.966) 33.52,45.055 35.557,47.092 68.622,47.092 v1(69.257,46.457)
NetD8_37: D8.37 R28.1 | length 8.8
  L1 w0.2: D8.37@31.458,44.996 31.479,44.996 32.449,45.966 v1(32.469,45.966) ; R28.1@37.059,50.195 37.109,50.145 v1(37.109,48.59)
  L4 w0.2: v1(32.469,45.966) 32.469,46.033 35.027,48.59 v1(37.109,48.59)
NetD8_47: D8.47 D10.29 | length 37.1
  L1 w0.155: D8.47@27.923,48.531 27.927,48.531 28.875,49.479 v1(28.88,49.479) ; v1(62.992,50.25) 63.026,50.284 64.203,50.284 D10.29@64.237,50.317
  L3 w0.13: v1(28.88,49.479) 29.312,49.911 62.653,49.911 v1(62.992,50.25)
NetD8_48: D8.48 D10.2 | length 47
  L1 w0.155: D8.48@27.569,48.885 27.569,48.914 28.46,49.805 v1(28.46,49.834) ; v1(71.471,47.212) 71.513,47.253 72.628,47.253 D10.2@72.669,47.295
  L4 w0.119: v1(28.46,49.834) 28.867,50.241 44.526,50.241 47.269,47.498 70.358,47.498 70.644,47.212 v1(71.471,47.212)
NetD8_51: D8.51 D10.3 | length 50.1
  L1 w0.155: D8.51@24.67,49.592 24.669,49.593 24.669,49.688 v1(25.019,50.038) ; v1(71.501,47.761) 71.522,47.782 72.648,47.782 D10.3@72.669,47.803
  L4 w0.119: v1(25.019,50.038) 26.086,51.105 44.044,51.105 47.396,47.752 71.492,47.752 v1(71.501,47.761)
NetD8_52: D8.52 D10.4 | length 52.7
  L1 w0.155: D8.52@24.317,49.238 24.295,49.238 23.571,49.962 23.571,50.292 24.003,50.724 24.228,50.724 24.507,50.444 v1(24.587,50.444) ; v1(71.501,48.311) D10.4@72.669,48.311
  L4 w0.119: v1(24.587,50.444) 25.603,51.46 43.998,51.46 47.452,48.006 70.383,48.006 70.688,48.311 v1(71.501,48.311)
NetD8_94: D8.94 R29.1 | length 19.2
  L1 w0.155: D8.94@22.549,32.551 22.571,32.551 23.472,33.452 v1(23.495,33.452)
  L3 w0.2: v1(11.506,44.171) 19.558,36.119 20.828,36.119 v1(23.495,33.452)
  L4 w0.155: v1(11.506,44.171) 12.437,43.239 R29.1@12.607,43.239
NetD10_7: D10.7 R35.1 | length 2
  L1 w0.155: D10.7@72.669,49.809 74.625,49.809 R35.1@74.676,49.759
NetD10_20: D10.20 R43.1 | length 6.2
  L1 w0.155: R43.1@66.848,59.233 67.589,59.233 67.691,59.131 D10.20@67.691,53.772
NetD10_21: D10.21 R42.1 | length 3.5
  L1 w0.155: R42.1@66.848,57.074 67.208,56.713 D10.21@67.208,53.772
NetD10_24: D10.24 R44.1 | length 2.8
  L1 w0.155: v1(65.71,52.248) D10.24@65.71,53.772
  L4 w0.155: R44.1@64.44,52.248 v1(65.71,52.248)
NetD10_26: D10.26 R48.1 X12.11 | length 27.4
  L1 w0.155: X12.11@63.906,76.327 63.906,69.215 61.951,67.259 61.951,55.728 61.773,55.55 61.773,54.102 R48.1@61.798,54.077 61.849,54.026 62.586,54.026 62.738,53.873 62.738,52.426 63.348,51.816 D10.26@64.237,51.816
NetD10_27: D10.27 R52.1 | length 2.7
  L1 w0.155: R52.1@61.798,51.918 61.824,51.892 62.586,51.892 63.17,51.308 D10.27@64.237,51.308
NetD10_28: D10.28 R50.1 X12.10 | length 34.4
  L1 w0.155: R50.1@61.798,49.759 61.824,49.784 61.824,50.673 61.951,50.8 v1(62.992,50.8) D10.28@64.237,50.8 ; v1(65.761,73.99) 65.786,74.016 65.786,74.448 66.142,74.803 X12.10@71.501,74.803
  L4 w0.155: v1(62.992,50.8) 62.992,52.139 62.995,52.142 62.995,52.353 62.992,52.356 62.992,56.261 62.611,56.642 62.611,60.452 64.541,62.382 64.541,63.627 65.786,64.872 65.786,73.965 v1(65.761,73.99)